# Altium PCB PCB1.PcbDoc
Units mil, origin at the board's own origin, x right, y up, seen from the top; angles counter-clockwise.
Board outline 6000 x 4000 mil, 2 copper layers (Top Layer, Bottom Layer); 20 components, 16 nets, 61 pads, 0 vias.
Unrouted connection lines stored in the file: 44.
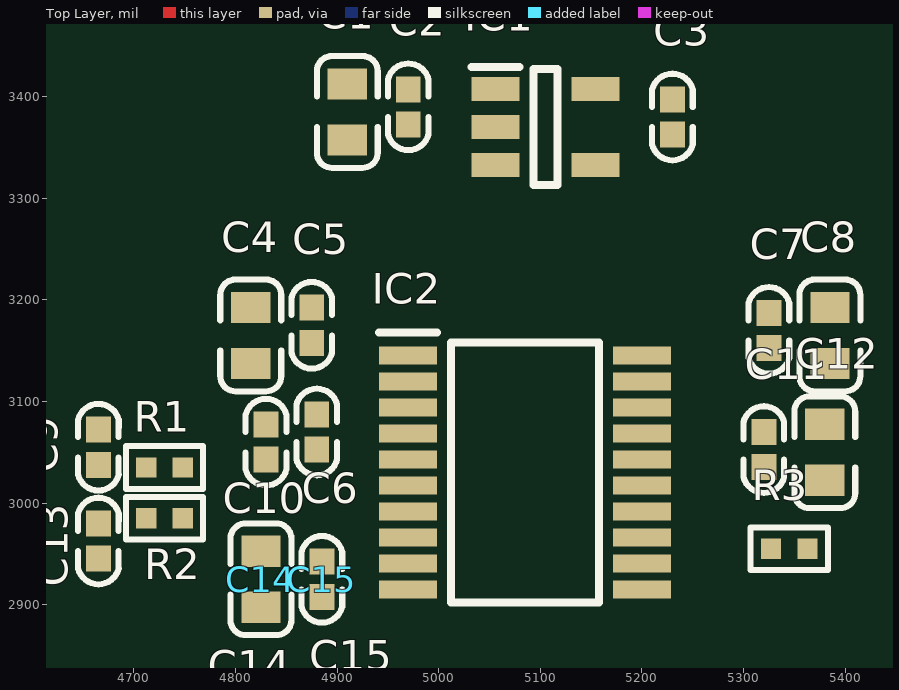
[diagram p0: Top Layer view]
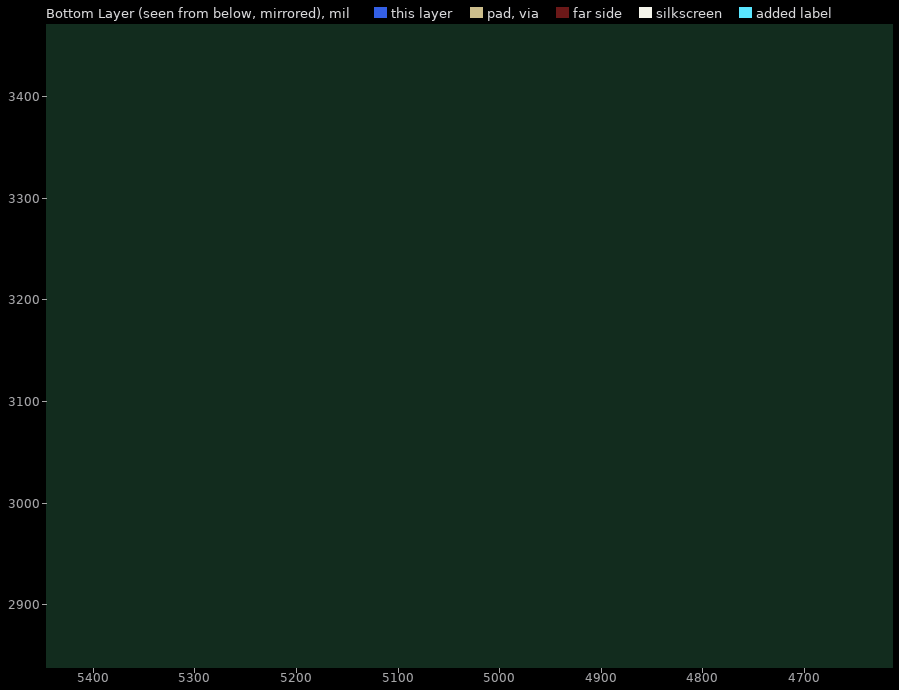
[diagram p1: Bottom Layer view, seen from below]

## Layer stack, top to bottom
Top Solder: solder mask 0.4, Solder Resist, Dk 3.5
Top Layer: signal copper 1.4
Dielectric 1: dielectric 12.6, FR-4, Dk 4.8
Bottom Layer: signal copper 1.4
Bottom Solder: solder mask 0.4, Solder Resist, Dk 3.5

## Board outline
1000,1000 7000,1000 7000,5000 1000,5000

## Design rules (kind name [scope] priority, off if disabled: settings)
Clearance [All] p1: gap=10 ignorepadtopadclearanceinfootprint=FALSE except(0: Arc-Hole Track-Hole SMDPad-Hole THPad-Hole Via-Hole Fill-Hole Poly-Hole Region-Hole Text-Hole)
PolygonConnect [All] p1: connectstyle=Relief reliefconductorwidth=10 reliefentries=4 polygonreliefangle="90 Angle" airgapwidth=10
RoutingVias [All] p1: holewidth=28 width=50 viastyle="Through Hole" minholewidth=28 minwidth=50 maxholewidth=28 maxwidth=50
SolderMaskExpansion [All] p1: expansion=4 istentingtop=FALSE
Width [All] p1: maxlimit=10 minlimit=10 preferedwidth=10
30 further rules are at their usual default settings.

## Components (designator, comment, footprint, x,y, rotation, side; value= is the part's Value field where it differs from the comment)
C1 "10uF 6.3V" 0603C 4910,3385 r90 top
C2 "100nF 16V" 0402C 4970,3390 r90 top
C3 "100nF 16V" 0402C 5230,3380 r90 top
C4 "10uF 6.3V" 0603C 4815,3165 r270 top
C5 "100nF 16V" 0402C 4875,3175 r270 top
C6 "2.2uF 16V" 0402C 4880,3070 r270 top
C7 "100nF 16V" 0402C 5325,3170 r270 top
C8 "10uF 6.3V" 0603C 5385,3165 r270 top
C9 "22nF" 0402C 4665,3055 r90 top
C10 "2.2uF 16V" 0402C 4830,3060 r90 top
C11 "100nF 16V" 0402C 5320,3052.68 r270 top
C12 "10uF 6.3V" 0603C 5380,3050 r270 top
C13 "22nF" 0402C 4665,2962.68 r90 top
C14 "10uF 6.3V" 0603C 4825,2925 r90 top
C15 "100nF 16V" 0402C 4885,2925 r90 top
IC1 "TLV71333PDBVR" SOT95P280X145-5N 5105,3370 r0 top
IC2 "PCM5102APWR" SOP65P640X120-20N 5085,3030 r0 top
R1 "470R" 0402R 4730,3035 r180 top
R2 "470R" 0402R 4730,2985 r180 top
R3 "10K" 0402R 5345,2955 r180 top

## Footprints (in the part's own frame and the unit in brackets; to place one, negate y for a bottom-side part, rotate by r counter-clockwise, add the part's x,y. Pads: shape width x height; smd on the part's side, far side on the other; paste and mask are expansions set on the pad)
0402C [mm]
  rect 0.65x0.62 smd: 1(-0.44,0) 2(0.44,0)
  silkscreen extent -1.08,-0.51 1.08,0.51, body extent -0.51,-0.25 0.49,0.25, height 0.55
0402R [mil]
  rect 20x20 smd: 1(-18,0) 2(18,0)
  silkscreen extent -38,-21 38,21, body extent -20,-11 20,11, height 16
0603C [mm]
  rect 0.78x0.98 smd: 1(-0.7,0) 2(0.7,0)
  silkscreen extent -1.4,-0.76 1.4,0.76, body extent -0.8,-0.4 0.8,0.4, height 0.87
SOP65P640X120-20N [mm]
  rect 1.45x0.45 smd: 1(-2.925,2.925) 2(-2.925,2.275) 3(-2.925,1.625) 4(-2.925,0.975) 5(-2.925,0.325) 6(-2.925,-0.325) 7(-2.925,-0.975) 8(-2.925,-1.625) 9(-2.925,-2.275) 10(-2.925,-2.925) 11(2.925,-2.925) 12(2.925,-2.275) 13(2.925,-1.625) 14(2.925,-0.975) 15(2.925,-0.325) 16(2.925,0.325) 17(2.925,0.975) 18(2.925,1.625) 19(2.925,2.275) 20(2.925,2.925)
  silkscreen extent -3.65,-3.25 1.85,3.5, body extent -3.2,-3.25 3.2,3.25, height 1.2
SOT95P280X145-5N [mm]
  rect 1.2x0.6 smd: 1(-1.25,0.95) 2(-1.25,0) 3(-1.25,-0.95) 4(1.25,-0.95) 5(1.25,0.95)
  silkscreen extent -1.85,-1.45 0.3,1.5, body extent -1.4,-1.45 1.4,1.45, height 1.45

## Part data
C1 C2 C3 C4 C5 C6 C7 C8 C9 C10 C11 C12 C13 C14 C15: library part CAP-NP
IC1: "Integrated Circuit", Manufacturer_Name="Texas Instruments", Mouser Part Number=595-TLV71333PDBVR, Arrow Part Number=TLV71333PDBVR, Arrow Price/Stock=https://www.arrow.com/en/products/tlv71333pdbvr/texas-instruments, Datasheet Link=http://www.ti.com/lit/gpn/tlv713p, Height=1.45mm, Manufacturer_Part_Number=TLV71333PDBVR, Mouser Price/Stock=https://www.mouser.co.uk/ProductDetail/Texas-Instruments/TLV71333PDBVR?qs=FBI%252BX3tnPf1lCQ%252BDbwaFmA%3D%3D
IC2: "Integrated Circuit", Manufacturer_Name="Texas Instruments", Mouser Part Number=595-PCM5102APWR, Arrow Part Number=PCM5102APWR, Arrow Price/Stock=https://www.arrow.com/en/products/pcm5102apwr/texas-instruments, Datasheet Link=https://componentsearchengine.com/Datasheets/2/PCM5102APWR.pdf, Height=1.2mm, Manufacturer_Part_Number=PCM5102APWR, Mouser Price/Stock=https://www.mouser.co.uk/ProductDetail/Texas-Instruments/PCM5102APWR?qs=E2%2FxqS9xjzrfECkwEYoiyg%3D%3D
R1 R2 R3: library part RES

## Nets (pads, with @x,y where several pads share a name; then routed paths per layer and width w, separated by ;. In a path a pad name is that pad's centre, name@x,y a point inside that pad or via, vN(x,y) a via of type N, cw(c..) or ccw(c..) an arc to the next point about the centre after c; other vN are vias at no path point)
3.3V: C1.2 C2.2 C7.1 C8.1 IC1.1 IC1.3 IC2.20 R3.1
A3.3V: C3.2 C4.1 C5.1 C14.2 C15.2 IC1.5 IC2.1 IC2.8
GND: C1.1 C2.1 C3.1 C4.2 C5.2 C7.2 C8.2 C9.2 C10.2 C11.1 C12.1 C13.1 C14.1 C15.1 IC1.2 IC2.3 IC2.9 IC2.10 IC2.11 IC2.16 IC2.19
I2S_BCLK: IC2.13
I2S_LRCLK: IC2.15
I2S_SDOUT: IC2.14
NetC6_1: C6.1 IC2.2
NetC6_2: C6.2 IC2.4
NetC10_1: C10.1 IC2.5
NetC11_2: C11.2 C12.2 IC2.18
NetIC2_6: IC2.6 R1.1
NetIC2_7: IC2.7 R2.1
NetIC2_17: IC2.17 R3.2
OUTL: C9.1 R1.2
OUTR: C13.2 R2.2
SCK: IC2.12
pads on no net: IC1.4